# EAGLE board PCB-E21-CMB6 (EAGLE 7.7.0), part 1 of 2
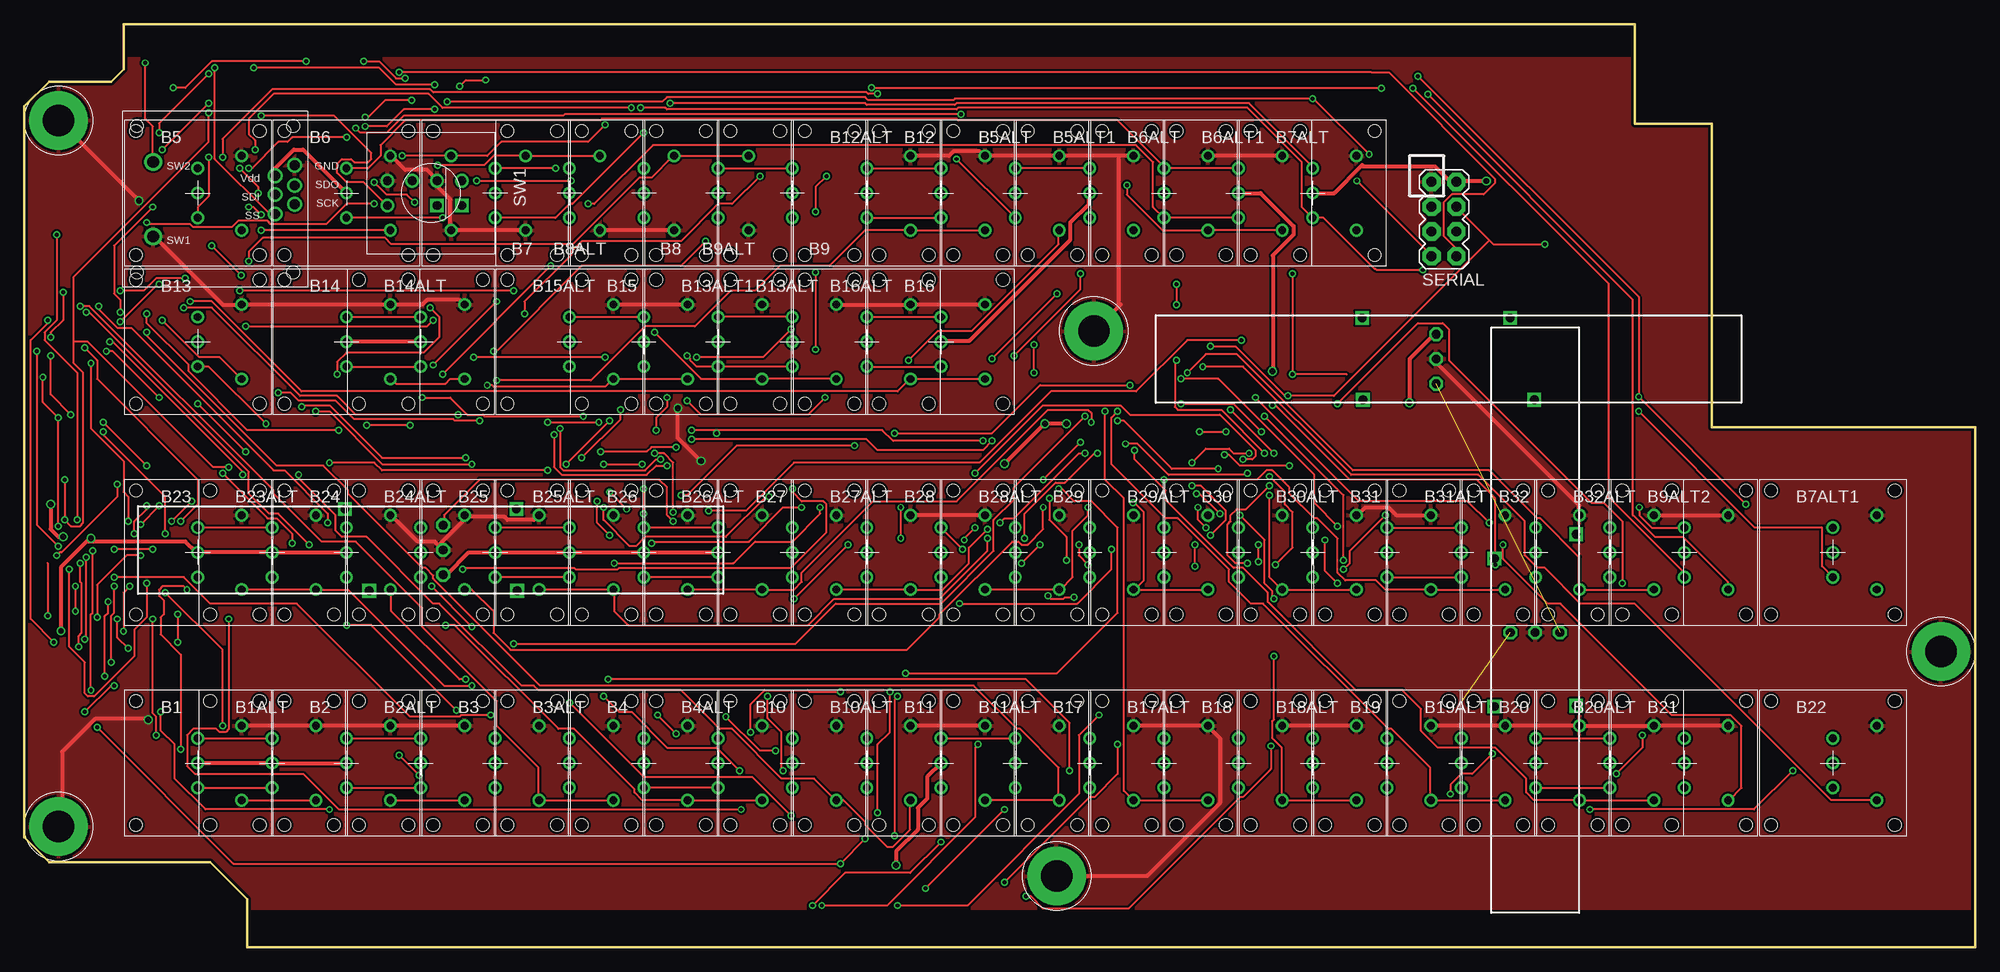
[diagram p0: board, top side]
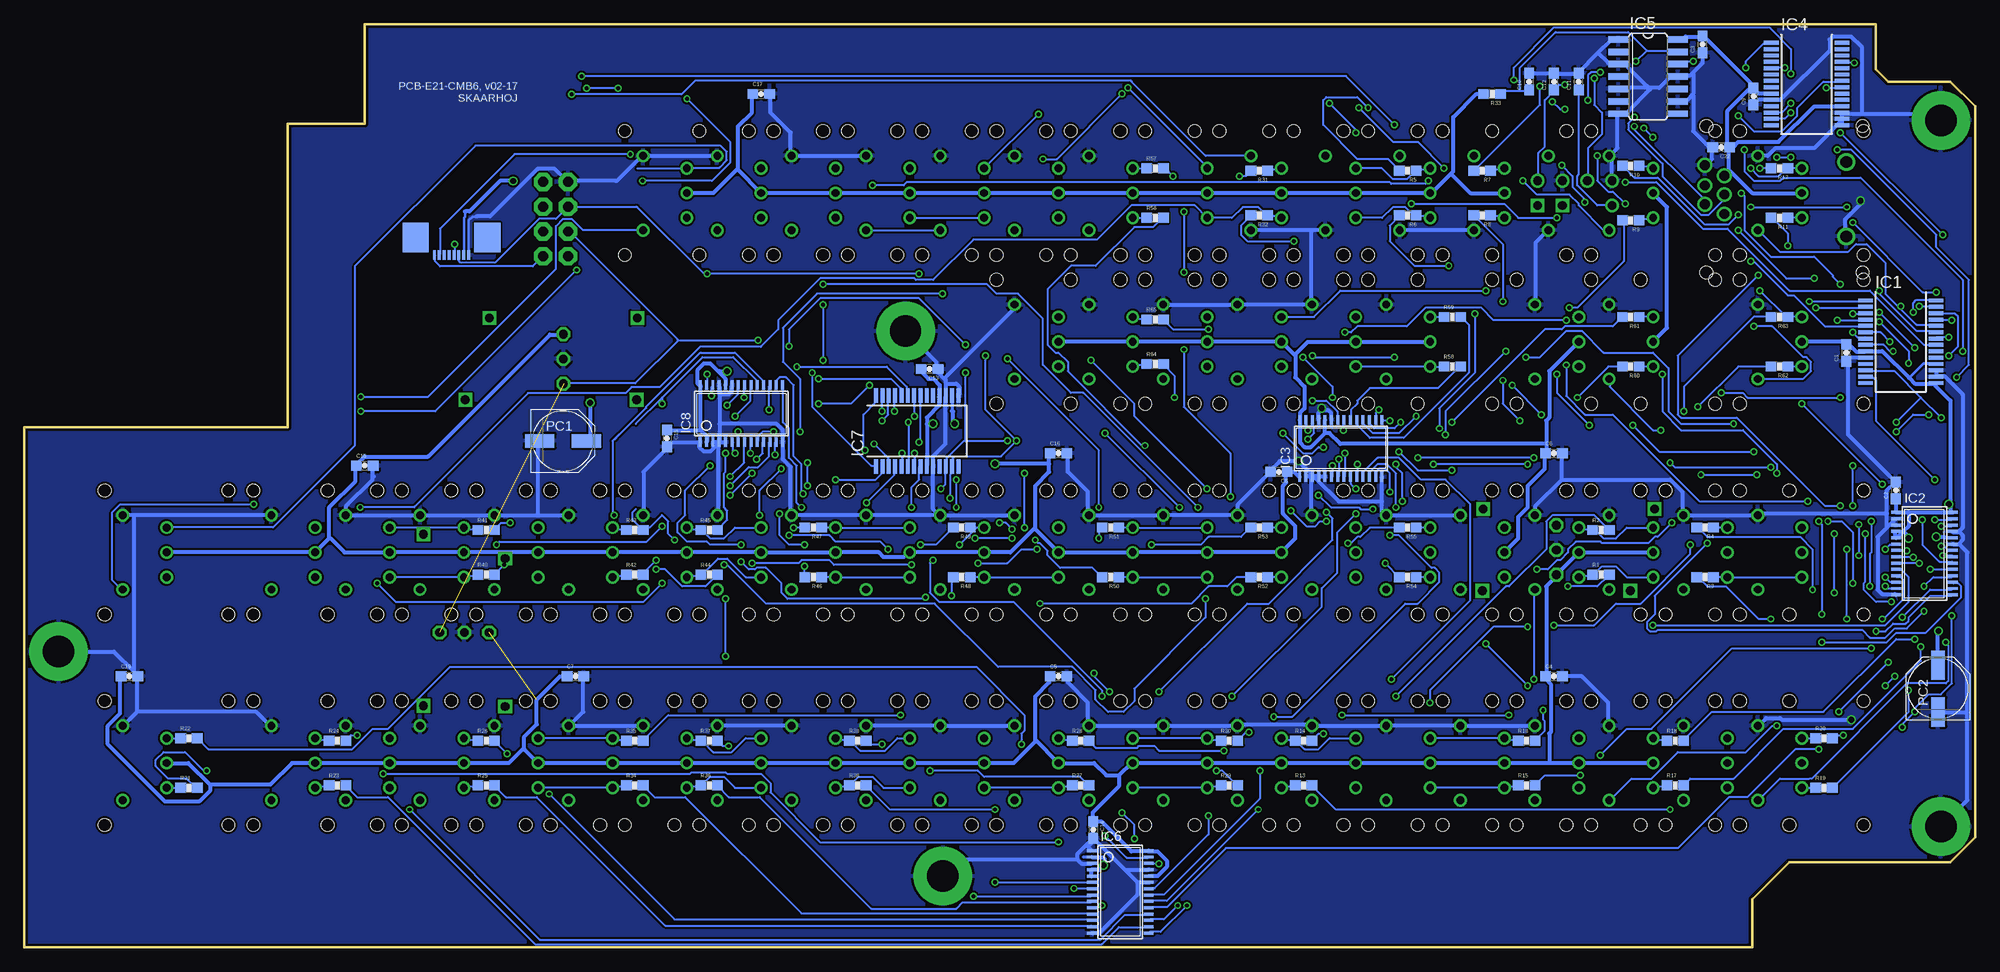
[diagram p1: board, bottom side, seen from below]

Size 200 x 94.6 mm. Coordinates in mm from the lower left corner, seen from the top.
Outline: 0,86.2 0,11.27 2.54,8.73 19.05,8.73 22.86,4.92 22.86,0 200,0 200,53.3 173.03,53.3 173.03,84.42 165.1,84.42 165.1,94.6 10.16,94.6 10.16,90.01 8.89,88.74 2.54,88.74 0,86.2
Copper layers (1*16): Top 0.035mm / dielectric 1.5mm / Bottom 0.035mm
Design rules "Fusion_eagle_rule_v1.1": minimum track width 6mil, minimum drill 12mil, track to track 6mil, track to pad 6mil, pad to pad 6mil, via to via 6mil, smd to smd 0mil, copper to edge 10mil, drill to drill 10mil, minimum pad ring 10mil, minimum via ring 6mil, stop-mask expansion 2mil, vias tented up to drill 100mil, thermal gap 10mil
Net classes: 0 default: width 0.203 mm, drill 0.406 mm, clearance 0.152 mm; 1 Power: width 0.406 mm, drill 0.61 mm, clearance 0.203 mm
tRestrict: area 0,-2.7 to 223,3.8; area 0,91.3 to 223,97.3
bRestrict: area 0,94.8 to 223,97.3; area 0,-2.7 to 223,-0.2

## Footprints (pad centres in the part's own frame; a part is rotated, then mirrored left to right if it is on the bottom)
LP11 = drill 0.8: COM 0,0; P$2 0,2.54; P$3 0,-2.54; P$4 4.5,3.81; P$5 4.5,-3.81 | hole 1.3: -6.35,6.35; 6.35,6.35; 6.35,-6.35; -6.35,-6.35
0603-CAP = smd 1.1 x 1: 1 -0.85,0; 2 0.85,0
SSOP28 = smd 0.4 x 1.5: 1 -4.225,-3.625; 2 -3.575,-3.625; 3 -2.925,-3.625; 4 -2.275,-3.625; 5 -1.625,-3.625; 6 -0.975,-3.625; 7 -0.325,-3.625; 8 0.325,-3.625; 9 0.975,-3.625; 10 1.625,-3.625; 11 2.275,-3.625; 12 2.925,-3.625; 13 3.575,-3.625; 14 4.225,-3.625; 15 4.225,3.625; 16 3.575,3.625; 17 2.925,3.625; 18 2.275,3.625; 19 1.625,3.625; 20 0.975,3.625; 21 0.325,3.625; 22 -0.325,3.625; 23 -0.975,3.625; 24 -1.625,3.625; 25 -2.275,3.625; 26 -2.925,3.625; 27 -3.575,3.625; 28 -4.225,3.625
TSSOP28 = smd 0.305 x 0.991: 1 -4.225,-2.918; 2 -3.575,-2.918; 3 -2.925,-2.918; 4 -2.275,-2.918; 5 -1.625,-2.918; 6 -0.975,-2.918; 7 -0.325,-2.918; 8 0.325,-2.918; 9 0.975,-2.918; 10 1.625,-2.918; 11 2.275,-2.918; 12 2.925,-2.918; 13 3.575,-2.918; 14 4.225,-2.918; 15 4.225,2.918; 16 3.575,2.918; 17 2.925,2.918; 18 2.275,2.918; 19 1.625,2.918; 20 0.975,2.918; 21 0.325,2.918; 22 -0.325,2.918; 23 -0.975,2.918; 24 -1.625,2.918; 25 -2.275,2.918; 26 -2.925,2.918; 27 -3.575,2.918; 28 -4.225,2.918
SO14 = smd 0.66 x 2.032: 1 -3.81,-3.073; 2 -2.54,-3.073; 3 -1.27,-3.073; 4 0,-3.073; 5 1.27,-3.073; 6 2.54,-3.073; 7 3.81,-3.073; 8 3.81,3.073; 9 2.54,3.073; 10 1.27,3.073; 11 0,3.073; 12 -1.27,3.073; 13 -2.54,3.073; 14 -3.81,3.073
PANASONIC_D = smd 3 x 1.4: + 2.4,0; - -2.4,0
SLIDER45-CAR1 = drill 0.9 octagon: 1 -1.27,2.54; 2A -1.27,-2.54; 3 -1.27,0 | drill 0.9 square: P$1 -8.852,4.191; P$2 6.312,4.191; P$3 8.788,-4.191; P$4 -8.788,-4.191
0603-RES = smd 1.1 x 1: 1 -0.85,0; 2 0.85,0
2X4 = drill 1.016 pad 1.88 octagon: 1 -3.81,-1.27; 2 -3.81,1.27; 3 -1.27,-1.27; 4 -1.27,1.27; 5 1.27,-1.27; 6 1.27,1.27; 7 3.81,-1.27; 8 3.81,1.27
SMART_SWITCH = drill 1.2: 1 6.35,3.81; 2 6.35,-3.81 | drill 1: 3 -8.153,-3.48; 4 -6.147,-2.413; 5 -8.153,-1.422; 6 -6.147,-0.483; 7 -8.153,0.508; 8 -6.147,1.499 | hole 1.3: -8.001,7.506; 8.001,7.506; 8.001,-7.506; -8.001,-7.506
ALPS_EC12E_SW-CAR1 = drill 0.9: A 1.27,-4.445; B -1.27,-1.905; C -1.27,-4.445; D -1.27,0.635; E -1.27,3.175 | drill 0.9 square: GND1 1.27,3.175; GND2 1.27,0.635
3.2MMPAD6MM = drill 3.2 pad 6: P$1 0,0
ZIP-8-0.5 = smd 2.7 x 3: GND$1 3.68,-1.8; GND$9 -3.68,-1.8 | smd 0.3 x 0.96: P$1 -1.75,0; P$2 -1.25,0; P$3 -0.75,0; P$4 -0.25,0; P$5 0.25,0; P$6 0.75,0; P$7 1.25,0; P$8 1.75,0

## Placement (x,y rotation side)
B1  LP11-B"  [LP11]  17.78,18.89 0 top
B1ALT  LP11-B"  [LP11]  25.4,18.89 0 top
B2  LP11-B"  [LP11]  33.02,18.89 0 top
B2ALT  LP11-B"  [LP11]  40.64,18.89 0 top
B3  LP11-B"  [LP11]  48.26,18.89 0 top
B3ALT  LP11-B"  [LP11]  55.88,18.89 0 top
B4  LP11-B"  [LP11]  63.5,18.89 0 top
B4ALT  LP11-B"  [LP11]  71.12,18.89 0 top
B5  LP11-B"  [LP11]  17.78,77.31 0 top
B5ALT  LP11-B"  [LP11]  101.6,77.31 0 top
B5ALT1  LP11-B"  [LP11]  109.22,77.31 0 top
B6  LP11-B"  [LP11]  33.02,77.31 0 top
B6ALT  LP11-B"  [LP11]  116.84,77.31 0 top
B6ALT1  LP11-B"  [LP11]  124.46,77.31 0 top
B7  LP11-B"  [LP11]  48.26,77.31 180 top
B7ALT  LP11-B"  [LP11]  132.08,77.31 0 top
B7ALT1  LP11-B"  [LP11]  185.42,40.48 0 top
B8  LP11-B"  [LP11]  63.5,77.31 180 top
B8ALT  LP11-B"  [LP11]  55.88,77.31 180 top
B9  LP11-B"  [LP11]  78.74,77.31 180 top
B9ALT  LP11-B"  [LP11]  71.12,77.31 180 top
B9ALT2  LP11-B"  [LP11]  170.18,40.48 0 top
B10  LP11-B"  [LP11]  78.74,18.89 0 top
B10ALT  LP11-B"  [LP11]  86.36,18.89 0 top
B11  LP11-B"  [LP11]  93.98,18.89 0 top
B11ALT  LP11-B"  [LP11]  101.6,18.89 0 top
B12  LP11-B"  [LP11]  93.98,77.31 0 top
B12ALT  LP11-B"  [LP11]  86.36,77.31 0 top
B13  LP11-B"  [LP11]  17.78,62.07 0 top
B13ALT  LP11-B"  [LP11]  78.74,62.07 0 top
B13ALT1  LP11-B"  [LP11]  71.12,62.07 0 top
B14  LP11-B"  [LP11]  33.02,62.07 0 top
B14ALT  LP11-B"  [LP11]  40.64,62.07 0 top
B15  LP11-B"  [LP11]  63.5,62.07 0 top
B15ALT  LP11-B"  [LP11]  55.88,62.07 0 top
B16  LP11-B"  [LP11]  93.98,62.07 0 top
B16ALT  LP11-B"  [LP11]  86.36,62.07 0 top
B17  LP11-B"  [LP11]  109.22,18.89 0 top
B17ALT  LP11-B"  [LP11]  116.84,18.89 0 top
B18  LP11-B"  [LP11]  124.46,18.89 0 top
B18ALT  LP11-B"  [LP11]  132.08,18.89 0 top
B19  LP11-B"  [LP11]  139.7,18.89 0 top
B19ALT  LP11-B"  [LP11]  147.32,18.89 0 top
B20  LP11-B"  [LP11]  154.94,18.89 0 top
B20ALT  LP11-B"  [LP11]  162.56,18.89 0 top
B21  LP11-B"  [LP11]  170.18,18.89 0 top
B22  LP11-B"  [LP11]  185.42,18.89 0 top
B23  LP11-B"  [LP11]  17.78,40.48 0 top
B23ALT  LP11-B"  [LP11]  25.4,40.48 0 top
B24  LP11-B"  [LP11]  33.02,40.48 0 top
B24ALT  LP11-B"  [LP11]  40.64,40.48 0 top
B25  LP11-B"  [LP11]  48.26,40.48 0 top
B25ALT  LP11-B"  [LP11]  55.88,40.48 0 top
B26  LP11-B"  [LP11]  63.5,40.48 0 top
B26ALT  LP11-B"  [LP11]  71.12,40.48 0 top
B27  LP11-B"  [LP11]  78.74,40.48 0 top
B27ALT  LP11-B"  [LP11]  86.36,40.48 0 top
B28  LP11-B"  [LP11]  93.98,40.48 0 top
B28ALT  LP11-B"  [LP11]  101.6,40.48 0 top
B29  LP11-B"  [LP11]  109.22,40.48 0 top
B29ALT  LP11-B"  [LP11]  116.84,40.48 0 top
B30  LP11-B"  [LP11]  124.46,40.48 0 top
B30ALT  LP11-B"  [LP11]  132.08,40.48 0 top
B31  LP11-B"  [LP11]  139.7,40.48 0 top
B31ALT  LP11-B"  [LP11]  147.32,40.48 0 top
B32  LP11-B"  [LP11]  154.94,40.48 0 top
B32ALT  LP11-B"  [LP11]  162.56,40.48 0 top
C1  100nF  [0603-CAP]  13.21,60.93 90 bottom
C2  100nF  [0603-CAP]  8.13,46.83 90 bottom
C3  100nF  [0603-CAP]  27.94,92.55 90 bottom
C4  100nF  [0603-CAP]  43.18,27.78 0 bottom
C5  100nF  [0603-CAP]  93.98,27.78 0 bottom
C6  100nF  [0603-CAP]  43.18,50.64 0 bottom
C7  100nF  [0603-CAP]  143.51,27.78 0 bottom
C8  100nF  [0603-CAP]  71.37,48.73 180 bottom
C9  100nF  [0603-CAP]  22.73,87.22 90 bottom
C10  10nF  [0603-CAP]  45.72,88.74 90 bottom
C11  10nF  [0603-CAP]  40.64,88.74 90 bottom
C12  10nF  [0603-CAP]  43.18,88.74 90 bottom
C13  100nF  [0603-CAP]  107.19,59.28 180 bottom
C14  100nF  [0603-CAP]  90.42,12.03 270 bottom
C15  100nF  [0603-CAP]  134.11,52.16 270 bottom
C16  100nF  [0603-CAP]  93.98,50.64 0 bottom
C17  100nF  [0603-CAP]  124.46,87.47 0 bottom
C18  100nF  [0603-CAP]  165.1,49.37 0 bottom
C19  100nF  [0603-CAP]  189.23,27.78 0 bottom
C22  100nF  [0603-CAP]  26.04,82.01 180 bottom
IC1  MCP23017SS  [SSOP28]  7.62,62.07 270 bottom
IC2  PCA9685  [TSSOP28]  5.21,40.35 270 bottom
IC3  PCA9685  [TSSOP28]  65.02,51.15 0 bottom
IC4  MCP23017SS  [SSOP28]  17.27,88.49 270 bottom
IC5  74HCT14D  [SO14]  33.53,89.25 270 bottom
IC6  PCA9685  [TSSOP28]  87.63,5.68 270 bottom
IC7  MCP23017SS  [SSOP28]  108.46,52.93 0 bottom
IC8  PCA9685  [TSSOP28]  126.49,54.7 0 bottom
PC1  47u  [PANASONIC_D]  144.78,51.91 0 bottom
PC2  47u  [PANASONIC_D]  3.81,26.51 90 bottom
POT1  SLIDERC45  [SLIDER45-CAR1]  41.66,40.73 180 top
POT1ALT  SLIDERC45  [SLIDER45-CAR1]  146.01,60.31 0 top
POT2  SLIDERC45  [SLIDER45-CAR1]  154.89,33.54 90 top
R1  270  [0603-RES]  38.35,38.19 0 bottom
R2  270  [0603-RES]  38.35,42.77 0 bottom
R3  270  [0603-RES]  27.69,37.94 180 bottom
R4  270  [0603-RES]  27.69,43.02 180 bottom
R5  270  [0603-RES]  58.17,79.6 180 bottom
R6  270  [0603-RES]  58.17,75.02 180 bottom
R7  270  [0603-RES]  50.55,79.6 180 bottom
R8  270  [0603-RES]  50.55,75.02 180 bottom
R9  270  [0603-RES]  35.31,74.52 180 bottom
R10  270  [0603-RES]  35.31,80.1 180 bottom
R11  270  [0603-RES]  20.07,74.77 180 bottom
R12  270  [0603-RES]  20.07,79.85 180 bottom
R13  270  [0603-RES]  68.83,16.6 0 bottom
R14  270  [0603-RES]  68.83,21.18 0 bottom
R15  270  [0603-RES]  45.97,16.6 0 bottom
R16  270  [0603-RES]  45.97,21.18 0 bottom
R17  270  [0603-RES]  30.73,16.6 0 bottom
R18  270  [0603-RES]  30.73,21.18 0 bottom
R19  270  [0603-RES]  15.49,16.35 0 bottom
R20  270  [0603-RES]  15.49,21.43 0 bottom
R21  270  [0603-RES]  183.13,16.35 0 bottom
R22  270  [0603-RES]  183.13,21.43 0 bottom
R23  270  [0603-RES]  167.89,16.6 0 bottom
R24  270  [0603-RES]  167.89,21.18 0 bottom
R25  270  [0603-RES]  152.65,16.6 0 bottom
R26  270  [0603-RES]  152.65,21.18 0 bottom
R27  270  [0603-RES]  91.69,16.6 0 bottom
R28  270  [0603-RES]  91.69,21.18 0 bottom
R29  270  [0603-RES]  76.45,16.6 0 bottom
R30  270  [0603-RES]  76.45,21.18 0 bottom
R31  270  [0603-RES]  73.41,79.6 180 bottom
R32  270  [0603-RES]  73.41,75.02 180 bottom
R33  100K  [0603-RES]  49.53,87.47 180 bottom
R34  270  [0603-RES]  137.41,16.6 0 bottom
R35  270  [0603-RES]  137.41,21.18 0 bottom
R36  270  [0603-RES]  129.79,16.6 0 bottom
R37  270  [0603-RES]  129.79,21.18 0 bottom
R38  270  [0603-RES]  114.55,16.6 0 bottom
R39  270  [0603-RES]  114.55,21.18 0 bottom
R40  270  [0603-RES]  152.65,38.19 0 bottom
R41  270  [0603-RES]  152.65,42.77 0 bottom
R42  270  [0603-RES]  137.41,38.19 0 bottom
R43  270  [0603-RES]  137.41,42.77 0 bottom
R44  270  [0603-RES]  129.79,38.19 0 bottom
R45  270  [0603-RES]  129.79,42.77 0 bottom
R46  270  [0603-RES]  119.13,37.94 180 bottom
R47  270  [0603-RES]  119.13,43.02 180 bottom
R48  270  [0603-RES]  103.89,37.94 180 bottom
R49  270  [0603-RES]  103.89,43.02 180 bottom
R50  270  [0603-RES]  88.65,37.94 180 bottom
R51  270  [0603-RES]  88.65,43.02 180 bottom
R52  270  [0603-RES]  73.41,37.94 180 bottom
R53  270  [0603-RES]  73.41,43.02 180 bottom
R54  270  [0603-RES]  58.17,37.94 180 bottom
R55  270  [0603-RES]  58.17,43.02 180 bottom
R56  270  [0603-RES]  84.07,74.77 0 bottom
R57  270  [0603-RES]  84.07,79.85 0 bottom
R58  270  [0603-RES]  53.59,59.53 0 bottom
R59  270  [0603-RES]  53.59,64.61 0 bottom
R60  270  [0603-RES]  35.31,59.53 180 bottom
R61  270  [0603-RES]  35.31,64.61 180 bottom
R62  270  [0603-RES]  20.07,59.53 180 bottom
R63  270  [0603-RES]  20.07,64.61 180 bottom
R64  270  [0603-RES]  84.07,59.78 0 bottom
R65  270  [0603-RES]  84.07,64.36 0 bottom
SERIAL  M04X2  [2X4]  145.54,74.64 270 top
SSW1  SMART_SWITCHSMART_SWITCH_8PIN  [SMART_SWITCH]  19.56,76.67 180 top
SW1  EC12E_SWCAR1  [ALPS_EC12E_SW-CAR1]  41.67,77.31 270 top
U$25  GNDPAD6MM  [3.2MMPAD6MM]  3.5,84.76 0 top
U$26  GNDPAD6MM  [3.2MMPAD6MM]  105.84,7.3 0 top
U$27  GNDPAD6MM  [3.2MMPAD6MM]  109.65,63.17 0 top
U$28  GNDPAD6MM  [3.2MMPAD6MM]  3.5,12.38 0 top
U$51  GNDPAD6MM  [3.2MMPAD6MM]  196.5,30.32 0 top
U$94  M04X2ZIF-0.5  [ZIP-8-0.5]  156.21,70.96 180 bottom

## Library data of the parts
B1 B1ALT B2 B2ALT B3 B3ALT B4 B4ALT B5 B5ALT B5ALT1 B6 B6ALT B6ALT1 B7 B7ALT B7ALT1 B8 B8ALT B9 B9ALT B9ALT2 B10 B10ALT B11 B11ALT B12 B12ALT B13 B13ALT B13ALT1 B14 B14ALT B15 B15ALT B16 B16ALT B17 B17ALT B18 B18ALT B19 B19ALT B20 B20ALT B21-B23 B23ALT B24 B24ALT B25 B25ALT B26 B26ALT B27 B27ALT B28 B28ALT B29 B29ALT B30 B30ALT B31 B31ALT B32 B32ALT POT1 POT1ALT POT2 SSW1 SW1 U$25-U$28 U$51 = SKAARHOJ
C1-C9 C13-C19 C22 = SparkFun; SKAARHOJ_ID: SK_100nF
C10-C12 = SparkFun; SKAARHOJ_ID: SK_10nF
IC1 IC4 IC7 = microchip; MF: MICROCHIP; MPN: MCP23017-E/SS; OC_FARNELL: 1467674; OC_NEWARK: 31K2960; SKAARHOJ_ID: SK_MCP23017
IC2 IC3 IC6 IC8 = wsmith; SKAARHOJ_ID: SK_PCA9685
IC5 = 74xx-eu; SKAARHOJ_ID: SK_74HCT14
PC1 PC2 = rcl; SKAARHOJ_ID: SK_47uF
R1-R32 R34-R65 = SparkFun; SKAARHOJ_ID: SK_270R
R33 = SparkFun; SKAARHOJ_ID: SK_100K
SERIAL = SparkFun; SKAARHOJ_ID: SK_2x4header
U$94 = SKAARHOJ; SKAARHOJ_ID: SK_ M04X2ZIF-0.5

## Nets
5V [Power]: B1.COM B1ALT.COM B2.COM B2ALT.COM B3.COM B3ALT.COM B4.COM B4ALT.COM B5.COM B5ALT1.COM B5ALT.COM B6.COM B6ALT1.COM B6ALT.COM B7.COM B7ALT1.COM B7ALT.COM B8.COM B8ALT.COM B9.COM B9ALT2.COM B9ALT.COM B10.COM B10ALT.COM B11.COM B11ALT.COM B12.COM B12ALT.COM B13.COM B13ALT1.COM B13ALT.COM B14.COM B14ALT.COM B15.COM B15ALT.COM B16.COM B16ALT.COM B17.COM B17ALT.COM B18.COM B18ALT.COM B19.COM B19ALT.COM B20.COM B20ALT.COM B21.COM B22.COM B23.COM B23ALT.COM B24.COM B24ALT.COM B25.COM B25ALT.COM B26.COM B26ALT.COM B27.COM B27ALT.COM B28.COM B28ALT.COM B29.COM B29ALT.COM B30.COM B30ALT.COM B31.COM B31ALT.COM B32.COM B32ALT.COM C1.2 C2.1 C3.2 C4.1 C5.1 C6.1 C7.1 C8.1 C9.2 C13.2 C14.1 C15.1 C16.1 C17.1 C18.1 C19.1 C22.1 IC1.9 IC1.15 IC1.18 IC2.1 IC2.4 IC2.5 IC2.24 IC2.28 IC3.1 IC3.24 IC3.28 IC4.9 IC4.18 IC5.14 IC6.2 IC6.4 IC6.5 IC6.24 IC6.28 IC7.9 IC7.16 IC7.18 IC8.2 IC8.24 IC8.28 PC1.+ PC2.+ POT1.1 POT1ALT.1 POT2.1 R33.2 SERIAL.2 SSW1.4 U$94.P$2
A0: POT1.2A POT1ALT.2A POT2.2A SERIAL.5
AD0: C12.1 IC4.1 SW1.E
D2: IC4.21 IC5.12
D3: C11.1 IC4.22 SW1.A
GND [Power]: B1.P$4 B1ALT.P$4 B2.P$4 B2ALT.P$4 B3.P$4 B3ALT.P$4 B4.P$4 B4ALT.P$4 B5.P$4 B5ALT1.P$4 B5ALT.P$4 B6.P$4 B6ALT1.P$4 B6ALT.P$4 B7.P$4 B7ALT1.P$4 B7ALT.P$4 B8.P$4 B8ALT.P$4 B9.P$4 B9ALT2.P$4 B9ALT.P$4 B10.P$4 B10ALT.P$4 B11.P$4 B11ALT.P$4 B12.P$4 B12ALT.P$4 B13.P$4 B13ALT1.P$4 B13ALT.P$4 B14.P$4 B14ALT.P$4 B15.P$4 B15ALT.P$4 B16.P$4 B16ALT.P$4 B17.P$4 B17ALT.P$4 B18.P$4 B18ALT.P$4 B19.P$4 B19ALT.P$4 B20.P$4 B20ALT.P$4 B21.P$4 B22.P$4 B23.P$4 B23ALT.P$4 B24.P$4 B24ALT.P$4 B25.P$4 B25ALT.P$4 B26.P$4 B26ALT.P$4 B27.P$4 B27ALT.P$4 B28.P$4 B28ALT.P$4 B29.P$4 B29ALT.P$4 B30.P$4 B30ALT.P$4 B31.P$4 B31ALT.P$4 B32.P$4 B32ALT.P$4 C1.1 C2.2 C3.1 C4.2 C5.2 C6.2 C7.2 C8.2 C9.1 C10.2 C11.2 C12.2 C13.1 C14.2 C15.2 C16.2 C17.2 C18.2 C19.2 C22.2 IC1.10 IC1.16 IC1.17 IC2.2 IC2.3 IC2.14 IC2.23 IC2.25 IC3.2 IC3.3 IC3.4 IC3.5 IC3.14 IC3.23 IC3.25 IC4.10 IC4.15 IC4.16 IC4.17 IC5.1 IC5.3 IC5.5 IC5.7 IC5.9 IC5.11 IC6.1 IC6.3 IC6.14 IC6.23 IC6.25 IC7.10 IC7.15 IC7.17 IC8.1 IC8.3 IC8.4 IC8.5 IC8.14 IC8.23 IC8.25 PC1.- PC2.- POT1.3 POT1ALT.3 POT2.3 SERIAL.1 SSW1.1 SSW1.3 SW1.C SW1.D U$25.P$1 U$26.P$1 U$27.P$1 U$28.P$1 U$51.P$1 U$94.P$1
GPA0: B8.P$5 B8ALT.P$5 IC1.21
GPA1: B7.P$5 B7ALT1.P$5 B7ALT.P$5 IC1.22
GPA2: B6.P$5 B6ALT1.P$5 B6ALT.P$5 IC1.23
GPA3: B5.P$5 B5ALT1.P$5 B5ALT.P$5 IC1.24
GPA4: B1.P$5 B1ALT.P$5 IC1.25
GPA4S: IC4.25 SSW1.2
GPA5: B2.P$5 B2ALT.P$5 IC1.26
GPA6: B3.P$5 B3ALT.P$5 IC1.27
GPA7: B4.P$5 B4ALT.P$5 IC1.28
GPA8: B16.P$5 B16ALT.P$5 IC1.1
GPA9: B15.P$5 B15ALT.P$5 IC1.2
GPA10: B14.P$5 B14ALT.P$5 IC1.3
GPA11: B13.P$5 B13ALT1.P$5 B13ALT.P$5 IC1.4
GPA12: B9.P$5 B9ALT2.P$5 B9ALT.P$5 IC1.5
GPA13: B10.P$5 B10ALT.P$5 IC1.6
GPA14: B11.P$5 B11ALT.P$5 IC1.7
GPA15: B12.P$5 B12ALT.P$5 IC1.8
GPA16: B24.P$5 B24ALT.P$5 IC7.21
GPA17: B23.P$5 B23ALT.P$5 IC7.22
GPA18: B22.P$5 IC7.23
GPA19: B21.P$5 IC7.24
GPA20: B17.P$5 B17ALT.P$5 IC7.25
GPA21: B18.P$5 B18ALT.P$5 IC7.26
GPA22: B19.P$5 B19ALT.P$5 IC7.27
GPA23: B20.P$5 B20ALT.P$5 IC7.28
GPA24: B32.P$5 B32ALT.P$5 IC7.1
GPA25: B31.P$5 B31ALT.P$5 IC7.2
GPA26: B30.P$5 B30ALT.P$5 IC7.3
GPA27: B29.P$5 B29ALT.P$5 IC7.4
GPA28: B25.P$5 B25ALT.P$5 IC7.5
GPA29: B26.P$5 B26ALT.P$5 IC7.6
GPA30: B27.P$5 B27ALT.P$5 IC7.7
GPA31: B28.P$5 B28ALT.P$5 IC7.8
GPB4: IC4.5 SSW1.8
I2C_SCL: IC1.12 IC2.26 IC3.26 IC4.12 IC6.26 IC7.12 IC8.26 SERIAL.4 U$94.P$4
I2C_SDA: IC1.13 IC2.27 IC3.27 IC4.13 IC6.27 IC7.13 IC8.27 SERIAL.3 U$94.P$3
L0: B1.P$2 B1ALT.P$2 R20.1
L1: B1.P$3 B1ALT.P$3 R19.1
L2: B2.P$2 B2ALT.P$2 R18.1
L3: B2.P$3 B2ALT.P$3 R17.1
L4: B3.P$2 B3ALT.P$2 R16.1
L5: B3.P$3 B3ALT.P$3 R15.1
L6: B4.P$2 B4ALT.P$2 R14.1
L7: B4.P$3 B4ALT.P$3 R13.1
L8: B5.P$2 B5ALT1.P$2 B5ALT.P$2 R12.1
L9: B5.P$3 B5ALT1.P$3 B5ALT.P$3 R11.1
L10: B6.P$2 B6ALT1.P$2 B6ALT.P$2 R10.1
L11: B6.P$3 B6ALT1.P$3 B6ALT.P$3 R9.1
L12: B7.P$2 B7ALT1.P$2 B7ALT.P$2 R8.1
L13: B7.P$3 B7ALT1.P$3 B7ALT.P$3 R7.1
L14: B8.P$2 B8ALT.P$2 R6.1
L15: B8.P$3 B8ALT.P$3 R5.1
L16: B9.P$2 B9ALT2.P$2 B9ALT.P$2 R32.1
L17: B9.P$3 B9ALT2.P$3 B9ALT.P$3 R31.1
L18: B10.P$2 B10ALT.P$2 R30.1
L19: B10.P$3 B10ALT.P$3 R29.1
L20: B11.P$2 B11ALT.P$2 R28.1
L21: B11.P$3 B11ALT.P$3 R27.1
L22: B12.P$2 B12ALT.P$2 R57.1
L23: B12.P$3 B12ALT.P$3 R56.1
L24: B13.P$2 B13ALT1.P$2 B13ALT.P$2 R63.1
L25: B13.P$3 B13ALT1.P$3 B13ALT.P$3 R62.1
L26: B14.P$2 B14ALT.P$2 R61.1
L27: B14.P$3 B14ALT.P$3 R60.1
L28: B15.P$2 B15ALT.P$2 R59.1
L29: B15.P$3 B15ALT.P$3 R58.1
L30: B16.P$2 B16ALT.P$2 R65.1
L31: B16.P$3 B16ALT.P$3 R64.1
L32: B17.P$2 B17ALT.P$2 R39.1
L33: B17.P$3 B17ALT.P$3 R38.1
L34: B18.P$2 B18ALT.P$2 R37.1
L35: B18.P$3 B18ALT.P$3 R36.1
L36: B19.P$2 B19ALT.P$2 R35.1
L37: B19.P$3 B19ALT.P$3 R34.1
L38: B20.P$2 B20ALT.P$2 R26.1
L39: B20.P$3 B20ALT.P$3 R25.1
L40: B21.P$2 R24.1
L41: B21.P$3 R23.1
L42: B22.P$2 R22.1
L43: B22.P$3 R21.1
L44: B23.P$2 B23ALT.P$2 R4.1
L45: B23.P$3 B23ALT.P$3 R3.1
L46: B24.P$2 B24ALT.P$2 R2.1
L47: B24.P$3 B24ALT.P$3 R1.1
L48: B25.P$2 B25ALT.P$2 R55.1
L49: B25.P$3 B25ALT.P$3 R54.1
L50: B26.P$2 B26ALT.P$2 R53.1
L51: B26.P$3 B26ALT.P$3 R52.1
L52: B27.P$2 B27ALT.P$2 R51.1
L53: B27.P$3 B27ALT.P$3 R50.1
L54: B28.P$2 B28ALT.P$2 R49.1
L55: B28.P$3 B28ALT.P$3 R48.1
L56: B29.P$2 B29ALT.P$2 R47.1
L57: B29.P$3 B29ALT.P$3 R46.1
L58: B30.P$2 B30ALT.P$2 R45.1
L59: B30.P$3 B30ALT.P$3 R44.1
L60: B31.P$2 B31ALT.P$2 R43.1
L61: B31.P$3 B31ALT.P$3 R42.1
L62: B32.P$2 B32ALT.P$2 R41.1
L63: B32.P$3 B32ALT.P$3 R40.1
MOSI: SERIAL.8 SSW1.6 U$94.P$8
N$2: IC6.13 R25.2
N$3: IC3.11 R27.2
N$4: IC2.13 R13.2
N$5: IC2.12 R14.2
N$6: IC3.10 R28.2
N$7: IC2.11 R15.2
N$8: IC3.9 R29.2
N$9: IC2.10 R16.2
N$10: IC2.9 R17.2
N$11: IC2.8 R18.2
N$12: IC2.7 R19.2
N$13: IC3.8 R30.2
N$14: IC3.7 R31.2
N$15: IC3.6 R32.2
N$16: IC6.12 R26.2
N$17: IC6.11 R34.2
N$18: IC6.10 R35.2
N$19: IC2.6 R20.2
N$20: IC2.15 R12.2
N$21: IC2.16 R11.2
N$22: IC2.17 R10.2
N$23: IC2.18 R9.2
N$24: IC2.19 R8.2
N$25: IC2.20 R7.2
N$26: IC2.21 R6.2
N$27: IC2.22 R5.2
N$28: IC6.9 R36.2
N$29: IC6.8 R37.2
N$30: IC6.7 R38.2
N$31: IC6.6 R39.2
N$32: IC6.15 R24.2
N$33: C10.1 IC5.13 R33.1 SW1.B
N$34: IC6.16 R23.2
N$35: IC6.17 R22.2
N$36: IC6.18 R21.2
N$37: IC6.19 R4.2
N$38: IC6.20 R3.2
N$39: IC6.21 R2.2
N$40: IC6.22 R1.2
N$41: IC8.13 R48.2
N$42: IC8.12 R49.2
N$43: IC8.11 R50.2
N$44: IC8.10 R51.2
N$45: IC8.9 R52.2
N$46: IC8.8 R53.2
N$47: IC8.7 R54.2
N$48: IC8.6 R55.2
N$49: IC8.15 R47.2
N$50: IC8.16 R46.2
N$51: IC8.17 R45.2
N$52: IC8.18 R44.2
N$53: IC8.19 R43.2
N$54: IC8.20 R42.2
N$55: IC8.21 R41.2
N$56: IC8.22 R40.2
N$57: IC3.12 R57.2
N$58: IC3.13 R56.2
N$59: IC3.15 R63.2
N$60: IC3.16 R62.2
N$61: IC3.17 R61.2
N$62: IC3.18 R60.2
N$63: IC3.19 R59.2
N$64: IC3.20 R58.2
N$65: IC3.21 R65.2
N$66: IC3.22 R64.2
SCLK: SERIAL.7 SSW1.7 U$94.P$7

## Tracks (layer width: path | path; a pad name or v marks a point on that pad's centre or on a via)
5V  (via drill 0.61)  (1 unrouted)
  Top 0.406: B1.COM B1ALT.COM B2.COM | v89.38,8.41 89.38,9.84 91.6,12.06 91.6,14.29 92.55,15.24 92.55,17.46 B11.COM | 137.15,80.15 134.3,77.31 B7ALT.COM | 137.15,80.15 137.16,80.17 | B24.COM B23ALT.COM B23.COM 17.62,40.48 16.51,41.59 6.83,41.59 | 6.83,41.59 6.35,41.59 3.81,39.05 3.75,38.92 v3.75,32.42 | v6.83,41.91 6.83,41.59 | B6.COM 28.57,81.75 27.62,81.75 25.72,79.85 25.72,79.22 SSW1.4 | B14ALT.COM B14.COM | POT1.1 43.02,38.26 43.34,38.26 45.56,40.48 B25.COM B25ALT.COM B26.COM B26ALT.COM | v106.84,53.66 v104.62,53.66 104.5,53.55 v100.5,49.55 | v3.97,42.07 3.49,42.07 2.7,42.86 v2.7,45.4 | v149.88,78.55 146.88,78.55 SERIAL.2 146.62,78.42 146.25,78.42 144.62,80.05 137.25,80.05 137.15,80.15 | v127.95,59.05 128,59.17 128,70.92 130.12,73.05 130.12,73.92 126.75,77.3 124.5,77.3 B6ALT1.COM | 162.5,40.55 B32ALT.COM | B5ALT1.COM 109.12,77.3 109.12,76.17 107.25,74.3 107.25,72.55 96.88,62.17 94,62.17 B16.COM | v142,55.8 142,60.3 144.5,62.8 POT1ALT.1
  Bottom 0.254: U$94.P$2 154.94,70.98 154.94,74.77 154.81,74.9 154.81,75.41
  Bottom 0.305: IC7.16 104.9,56.55 104.9,54.96 | IC6.2 91.44,9.26 91.44,9.24 | IC1.18 5.32,59.79 6.76,58.35 | IC2.24 3.02,41.98 3.05,42
  Bottom 0.406: IC4.9 22.18,87.51 C9.2 | C13.2 108.04,58.98 107.31,58.26 106.81,58.26 106.17,57.62 106.17,56.56 IC7.18 106.2,56.35 106.2,55.56 107.47,54.29 107.47,53.66 | IC6.24 84.61,7.3 83.82,7.3 82.87,8.25 82.87,8.89 83.82,9.84 84.61,9.84 IC6.28 84.77,9.84 86.52,9.84 89.53,12.86 90.33,12.86 C14.1 90.49,13.02 90.49,13.81 87.79,16.51 87.79,17.62 | B2.COM B2ALT.COM 43.66,18.89 | 43.66,18.89 B3.COM B3ALT.COM B4.COM B4ALT.COM B10.COM B10ALT.COM 86.52,18.89 87.79,17.62 | 180.97,16.67 180.97,16.03 182.09,14.92 185.58,14.92 191.45,20.8 191.45,22.7 190.18,23.97 190.18,27.78 C19.1 | 180.97,16.67 183.2,18.89 B22.COM | C7.1 145.1,27.78 147.48,25.4 147.48,22.86 148.75,21.59 148.75,20.32 | 148.75,20.32 B19ALT.COM B19.COM B18ALT.COM B18.COM B17ALT.COM B17.COM B11ALT.COM 98.58,18.89 96.36,21.11 96.36,21.27 | 148.75,20.32 148.91,20.32 150.34,18.89 B20.COM B20ALT.COM B21.COM 172.56,18.89 174.78,16.67 180.97,16.67 | IC6.5 90.65,7.3 90.65,7.94 IC6.4 90.49,7.94 89.85,7.94 v89.38,8.41 89.38,8.57 89.22,8.73 89.22,9.05 89.38,9.21 90.49,9.21 IC6.2 | 96.36,21.27 96.36,25.72 94.93,27.14 94.93,27.78 C5.1 | 96.36,21.27 B11.COM 90.33,18.89 89.06,17.62 87.79,17.62 | 126.84,79.69 126.84,84.14 125.41,85.56 125.41,87.47 C17.1 | 126.84,79.69 B6ALT1.COM B6ALT.COM B5ALT1.COM B5ALT.COM B12.COM B12ALT.COM B9.COM B9ALT.COM B8.COM B8ALT.COM 55.72,77.31 53.74,79.29 | B7ALT.COM 129.38,77.31 127,79.69 126.84,79.69 | R33.2 51.12,87.47 53.5,85.09 53.5,79.53 53.74,79.29 | B7.COM 51.75,77.31 53.74,79.29 | 107.47,53.66 107.47,49.37 IC7.9 | 128.83,58.97 129.7,59.85 130.33,59.85 130.97,59.21 130.97,57.78 130.81,57.62 IC8.28 130.65,57.47 130.65,53.02
  Bottom 0.406: 128.83,58.97 128.11,58.26 IC8.24 | 130.65,53.02 130.02,52.39 130.02,51.91 IC8.2 | 130.65,53.02 133.99,53.02 C15.1 | v127.95,59.05 128.75,59.05 128.83,58.97 | B15ALT.COM B15.COM 68.42,62.07 69.69,60.8 69.69,60.64 | 66.67,52.7 66.67,53.97 IC3.24 | 66.67,52.7 68.1,51.27 68.74,51.27 69.22,51.75 69.22,53.97 IC3.28 69.22,54.13 69.22,54.77 68.74,55.24 68.74,57.47 69.69,58.42 69.69,60.64 | 69.69,60.64 B13ALT1.COM B13ALT.COM B16ALT.COM B16.COM | 168.75,41.91 168.75,45.08 166.05,47.78 166.05,49.37 C18.1 165.88,49.55 165.12,50.3 158.62,50.3 146.12,62.8 144.75,62.8 POT1ALT.1 | 168.75,41.91 B9ALT2.COM B7ALT1.COM | 168.75,41.91 168.59,41.91 167.16,40.48 B32ALT.COM B32.COM B31ALT.COM B31.COM B30ALT.COM B30.COM B29ALT.COM 112.39,40.48 111.92,40 109.86,40 109.38,40.48 B29.COM B28ALT.COM 98.9,40.48 96.52,42.86 96.36,42.86 | IC2.4 8.26,42.54 8.26,42.07 IC2.5 7.94,42.07 7.38,42.62 | 8.1,44.61 6.83,44.61 | 6.83,44.61 2.54,44.61 | 2.54,44.61 2.38,44.61 IC2.28 | 8.1,44.61 IC2.1 | 8.1,44.61 8.1,45.88 C2.1 | 7.38,42.62 6.83,43.18 6.83,44.61 | 4.13,57.78 6.19,57.78 6.76,58.35 9.53,61.12 11.11,61.12 IC1.9 11.29,61.05 12.19,61.05 12.91,61.78 C1.2 13.02,61.91 13.18,62.07 B13.COM | 4.13,57.78 IC1.15 | 2.54,45.4 2.54,56.04 4.13,57.62 4.13,57.78 | 2.54,45.4 2.54,44.61 | 7.38,42.62 6.83,42.07 v6.83,41.91 | IC3.1 69.37,48.26 69.85,48.73 C8.1 70.64,48.58 70.64,47.62 70.96,47.31 70.96,44.45 69.69,43.18 69.69,41.91 B26ALT.COM B27.COM B27ALT.COM B28.COM 96.36,42.86 | 94.93,49.55 94.93,48.73 96.36,47.31 96.36,42.86 | 94.93,49.55 94.93,50.64 C16.1 | IC5.14 30.32,93.03 30,93.03 29.69,93.34 27.94,93.34 C3.2 27.78,93.34 22.7,88.26 C9.2
  Bottom 0.406: 25.24,79.53 25.24,81.91 C22.1 | 25.24,79.53 25.56,79.22 SSW1.4 | IC4.18 16.51,86.2 20.16,82.55 24.29,82.55 24.77,82.07 25.08,82.07 C22.1 | B5.COM 22.86,77.31 25.08,79.53 25.24,79.53 | C9.2 22.86,87.95 23.18,87.95 25.4,85.72 25.4,81.91 C22.1 | 43.97,51.59 43.97,53.97 43.66,54.29 43.66,59.05 B14ALT.COM | 43.97,51.59 43.97,50.64 C6.1 44.13,50.48 44.13,49.05 45.88,47.31 45.88,45.08 46.83,44.13 46.83,41.91 B25.COM | B6.COM 31.59,75.88 31.59,63.5 B14.COM | B24.COM B24ALT.COM POT1.1 42.86,38.1 43.97,36.99 43.97,27.78 C4.1 44.13,27.62 43.5,26.99 43.5,22.07 43.66,21.91 43.66,18.89 | 66.67,52.7 66.2,52.7 65.09,51.59 43.97,51.59 | v104.62,53.66 104.78,53.81 104.78,54.93 104.9,54.96 | 107.47,53.66 v106.84,53.66 | v3.97,42.07 3.17,42.07 3.05,42 | v2.7,45.4 2.54,45.4 | v149.88,78.55 151.25,78.55 154.38,75.42 154.75,75.42 154.81,75.41 | 94.93,49.55 v100.5,49.55 | v3.75,32.42 3.88,32.3 3.88,28.93 PC2.+ | v142,55.8 142,52.3 PC1.+
A0  (via drill 0.41)  (1 unrouted)
  Top 0.203: v66.52,43.65 65.88,44.29 65.88,47.15 65.09,47.94 46.67,47.94 43.02,44.29 43.02,43.34 POT1.2A | v70.17,44.77 73.98,44.77 78.9,49.69 97.95,49.69 105.25,56.99 113.98,56.99 119.22,62.23 v124.78,62.23
  Bottom 0.203: v66.52,43.65 67.15,43.65 67.63,43.18 68.58,43.18 v70.17,44.77 | 133.03,62.23 133,62.23 | 133,62.23 v124.78,62.23 | POT1ALT.2A 144.62,57.8 137.38,57.8 133,62.17 133,62.23 | SERIAL.5 144.25,73.3 144,73.3 133,62.3 133,62.23
AD0  (via drill 0.41)
  Top 0.203: v23.5,90.17 36.35,90.17 38.1,88.42 v42.07,88.42
  Bottom 0.203: SW1.E 44.77,78.58 44.77,81.44 44.13,82.07 44.13,86.83 43.18,87.79 C12.1 43.18,87.95 42.7,88.42 v42.07,88.42 | v23.5,90.17 23.5,90.8 21.59,92.71 20.95,92.71 IC4.1
D2  (via drill 0.41)
  Top 0.203: v15.24,88.11 16.51,88.11 19.21,90.8 v28.89,90.8
  Bottom 0.203: v15.24,88.11 13.65,88.11 IC4.21 | v28.89,90.8 30.16,90.8 30.32,90.64 IC5.12
D3  (via drill 0.41)
  Top 0.203: v24.29,85.25 31.75,85.25 35.56,81.44 35.56,80.8 35.24,80.48 33.81,80.48 33.5,80.8 32.54,80.8 32.07,80.33 32.07,79.37 33.02,78.42 34.77,78.42 37.15,76.04 SW1.A
  Bottom 0.203: C11.1 40.64,79.22 40.8,79.06 40.8,78.1 38.73,76.04 SW1.A | v24.29,85.25 22.7,83.66 19.84,83.66 18.26,85.25 18.26,86.04 15.56,88.74 13.65,88.74 IC4.22
GND  (via drill 0.61)
  Top 0.406: B16.P$4 B16ALT.P$4 B13ALT.P$4 | B15.P$4 B15ALT.P$4 | B9ALT.P$4 B8.P$4 | SSW1.1 13.34,72.86 20.32,65.88 B13.P$4 B14.P$4 40.8,65.88 41.27,66.36 44.61,66.36 45.09,65.88 B14ALT.P$4 | B8ALT.P$4 B7.P$4 43.66,73.66 43.66,76.67 42.39,77.94 42.39,78.58 SW1.D 42.23,78.74 41.27,79.69 39.05,79.69 37.62,81.12 B6.P$4 | v11.75,76.52 3.65,84.61 U$25.P$1 | B24.P$4 37.62,44.29 40.32,41.59 42.07,41.59 POT1.3 42.55,41.27 45.09,43.81 45.09,44.29 B24ALT.P$4 45.24,44.13 49.21,44.13 49.53,43.81 52.23,43.81 52.7,44.29 B25.P$4 | v66.99,55.24 66.99,52.23 v69.37,49.85 | B12ALT.P$4 94.77,81.12 95.25,81.6 97.95,81.6 98.42,81.12 B12.P$4 B5ALT.P$4 112.24,81.12 | B5ALT1.P$4 112.24,81.12 | B6ALT1.P$4 B6ALT.P$4 | B32ALT.P$4 B9ALT2.P$4 | U$27.P$1 109.7,63.18 112.39,65.88 112.24,65.88 112.24,81.12 | B31.P$4 140.65,44.29 139.86,45.08 137.48,45.08 136.68,44.29 B30ALT.P$4 | B28.P$4 B27ALT.P$4 | B21.P$4 B20ALT.P$4 B20.P$4 B19ALT.P$4 B19.P$4 | B18ALT.P$4 B18.P$4 | 3.81,12.54 3.65,12.38 U$28.P$1 3.88,12.68 3.88,20.05 7.25,23.43 12.62,23.43 v12.7,23.34 | B1.P$4 B1ALT.P$4 B2.P$4 B2ALT.P$4 | B17.P$4 B17ALT.P$4 121.44,22.54 122.56,21.43 122.56,14.76 115.09,7.3 105.89,7.3 U$26.P$1 | B11.P$4 B10ALT.P$4 | POT1ALT.3 144.75,59.92 159.38,45.3 159.38,44.3 B32.P$4
  Bottom 0.254: U$94.P$1 154.43,70.99 154.43,74.52 154.05,74.9 153.67,74.9
  Bottom 0.406: IC1.10 12.84,60.45 C1.1 13.02,60.01 13.02,52.54 8.26,47.78 C2.2 8.26,47.62 9.05,46.83 9.05,44.45 | C9.1 22.24,86.86 IC4.10 20.8,86.83 20,86.83 14.92,91.91 14.92,93.03 14.61,93.34 12.7,93.34 11.59,92.23 11.59,85.41 | 105.7,58.29 106.34,58.93 C13.1 106.52,59.37 106.52,60.01 109.54,63.02 U$27.P$1 | 105.7,58.29 105.54,58.13 105.54,57.78 | 105.54,57.78 IC7.17 105.57,56.35 105.57,51.59 106.84,50.32 106.84,49.37 IC7.10 106.84,49.21 106.84,44.92 106.2,44.29 B28ALT.P$4 | B13ALT.P$4 B13ALT1.P$4 B15.P$4 68.1,65.88 68.1,73.5 | B9ALT.P$4 68.1,73.5 | 68.1,73.5 B9.P$4 | 13.65,84.61 13.65,84.77 IC4.16 13.65,85.09 13.65,85.41 IC4.17 13.49,85.41 11.59,85.41 | 13.65,84.61 13.65,84.3 IC4.15 | 11.59,85.41 4.29,85.41 3.65,84.77 U$25.P$1 | B5.P$4 21.27,81.12 20.48,81.91 16.51,81.91 13.81,84.61 13.65,84.61 | C10.2 45.72,89.53 43.34,89.53 C12.2 43.18,89.53 40.64,89.53 C11.2 40.64,89.69 38.66,91.68 | 38.66,91.68 37.31,93.03 36.67,93.03 IC5.1 | SW1.C 37.31,78.58 37.31,81.12 B6.P$4 37.47,81.12 36.67,81.91 36.67,85.41 IC5.7 36.51,85.56 35.72,85.56 33.34,87.95 33.34,88.11 | SSW1.3 27.62,80.17 26.99,80.8 26.99,81.91 C22.2 27.15,81.91 28.89,83.66 28.89,87.31 28.97,87.39 | C3.1 27.94,90.64 28.97,89.61 | 28.97,89.61 29.21,89.38 30.32,89.38 IC5.11 30.64,89.22 31.27,89.22 32.38,88.11 33.34,88.11 | 28.97,87.39 28.89,87.47 28.89,89.53 28.97,89.61 | 28.97,87.39 29.53,86.83 30.32,86.83 IC5.9 | 33.34,88.11 33.66,88.11 | 33.66,88.11 36.51,88.11 IC5.5 | 33.66,88.11 33.66,88.26 35.88,90.49 36.51,90.49 IC5.3 36.67,90.64 37.62,90.64 38.66,91.68 | B14ALT.P$4 45.09,65.88 45.09,72.23 43.81,73.5 B7.P$4
  Bottom 0.406: v11.75,76.52 11.75,76.2 13.34,74.61 13.34,72.86 SSW1.1 | B8ALT.P$4 B8.P$4 | 8.49,43.58 8.26,43.81 IC2.2 | 8.49,43.58 8.97,43.1 | 8.97,43.1 10,42.07 10,36.67 9.53,36.19 8.26,36.19 IC2.14 | 8.49,43.58 8.26,43.34 IC2.3 | 9.05,44.45 9.05,43.18 8.97,43.1 | 9.05,44.45 22.23,44.45 B23.P$4 B23ALT.P$4 30,44.45 30,46.67 31.27,47.94 42.39,47.94 | 42.39,47.94 42.39,50.64 C6.2 | 42.39,47.94 45.09,45.24 45.09,44.29 B24ALT.P$4 | C16.2 93.03,50.64 93.03,48.73 90.96,46.67 90.96,44.29 B27ALT.P$4 B27.P$4 B26ALT.P$4 75.56,44.29 75.56,45.4 C8.2 72.23,48.89 71.28,49.85 v69.37,49.85 67.94,48.42 IC3.3 | 60.8,45.72 60.8,44.61 60.48,44.29 B25ALT.P$4 B25.P$4 | 60.8,45.72 60.8,48.1 IC3.14 | 66.99,55.08 66.36,55.08 66.04,54.77 66.04,54.13 IC3.23 | 66.99,55.08 67.31,54.77 67.31,54.13 IC3.25 | IC3.5 66.67,48.26 67.15,48.26 IC3.4 67.47,48.26 67.63,48.26 | 67.63,48.26 67.94,48.26 | 67.94,48.26 IC3.3 | 67.94,48.26 68.58,48.26 IC3.2 | v66.99,55.24 66.99,55.08 | B26.P$4 68.1,44.29 68.1,48.1 IC3.3 | 60.8,45.72 65.25,45.72 67.63,48.1 67.63,48.26 | C17.2 123.51,87.47 123.51,85.56 121.44,83.5 121.44,81.12 B6ALT.P$4 B5ALT1.P$4 | B6ALT1.P$4 B7ALT.P$4 136.68,81.12 139.22,78.58 139.38,78.55 144.12,78.55 SERIAL.1 144.38,78.55 145.62,79.8 147.38,79.8 152.25,74.92 153.62,74.92 153.67,74.9 | 147.32,44.29 B31ALT.P$4 B32.P$4 B32ALT.P$4 167,44.29 167,45.24 164.31,47.94 164.31,48.26 | 147.32,44.29 B31.P$4 | 164.31,48.26 164.31,49.37 C18.2 | B9ALT2.P$4 188.75,44.29 | 188.75,44.29 B7ALT1.P$4 | 164.15,48.26 164.31,48.26 | 105.54,57.78 104.46,57.78 104.14,57.47 104.14,56.67 IC7.15 | IC8.5 128.11,51.75 128.75,51.75 IC8.4 | IC8.3 129.38,51.75 128.91,51.75 IC8.4
  Bottom 0.406: 128.67,56.91 128.75,56.99 128.75,57.47 IC8.25 | 128.67,56.91 128.43,56.67 127.79,56.67 127.48,56.99 127.48,57.47 IC8.23 | 128.75,53.66 128.75,56.83 128.67,56.91 | 128.75,53.66 128.75,51.91 IC8.4 | IC8.4 128.91,51.59 129.7,50.8 130.33,50.8 130.81,51.27 130.81,51.59 IC8.1 130.81,51.75 133.67,51.75 133.99,51.43 C15.2 133.99,51.27 136.53,48.73 136.53,44.29 B30ALT.P$4 | B30.P$4 128.91,44.29 128.91,51.43 IC8.4 | B28ALT.P$4 B28.P$4 | B28ALT.P$4 B29.P$4 B29ALT.P$4 121.44,44.29 121.44,49.21 122.24,50 122.24,51.75 IC8.14 122.24,51.91 122.24,53.02 122.87,53.66 128.75,53.66 | 105.7,58.29 98.58,65.4 98.58,65.88 B16.P$4 | 188.44,24.13 188.44,27.78 C19.2 188.44,27.94 188.83,28.34 | 188.44,24.13 189.87,22.7 B22.P$4 | 188.83,28.34 190.82,30.32 U$51.P$1 | C7.2 142.72,27.78 142.72,24.13 144.15,22.7 B19.P$4 B18ALT.P$4 | 188.44,24.13 176.21,24.13 174.78,22.7 B21.P$4 | 1.75,41.27 2.22,41.27 IC2.23 | 1.75,41.27 1.27,41.75 1.27,42.23 1.59,42.54 | 1.59,42.54 2.22,42.54 IC2.25 | IC1.17 3.97,59.05 3.97,58.58 IC1.16 3.81,58.58 3.17,58.58 1.27,56.67 1.27,43.02 1.59,42.7 1.59,42.54 | 0.79,24.05 0.79,15.08 U$28.P$1 | 0.79,24.05 0.79,40.48 1.59,41.27 1.75,41.27 | C4.2 40.32,27.78 37.62,25.08 37.62,22.7 B2.P$4 | B2ALT.P$4 B3.P$4 B3ALT.P$4 B4.P$4 68.1,22.86 75.56,22.86 B4ALT.P$4 B10.P$4 B10ALT.P$4 90.96,22.7 90.96,25.08 93.03,27.14 93.03,27.78 C5.2 | 85.88,6.67 84.77,6.67 IC6.23 | 87.07,7.86 90.33,11.11 C14.2 | 87.07,7.86 85.88,6.67 | IC6.25 84.77,7.94 87,7.94 87.07,7.86 | 85.88,6.67 85.88,5.4 89.85,1.43 90.49,1.43 IC6.14 | C14.2 90.33,10.95 90.96,10.32 90.65,10 IC6.1 | 103.98,9.05 105.73,7.3 U$26.P$1 103.82,9.05 92.08,9.05
  Bottom 0.406: B11.P$4 B11ALT.P$4 B17.P$4 | v12.7,23.34 19.84,23.34 20,23.49 21.43,23.49 22.23,22.7 B1.P$4 | 3.97,23.34 PC2.- 3.62,24.05 0.79,24.05 | B17ALT.P$4 B18.P$4 | 188.75,44.29 188.75,28.41 188.83,28.34 | 92.08,9.05 91.6,8.57 90.65,8.57 IC6.3 | 92.08,9.05 92.08,9.52 90.49,11.11 C14.2 | 147.32,44.29 147.32,51.91 PC1.-
  pour Top: 0,-0.16 199.39,-0.16 199.39,95.09 0,95.09
  pour Bottom: 0,-0.16 199.39,-0.16 199.39,95.09 0,95.09
GPA0  (via drill 0.41)
  Top 0.203: v35.88,78.42 37.15,77.15 39.21,77.15 v40.01,76.36 | v42.39,80.17 47.15,80.17 48.1,81.12 B8ALT.P$5 B8.P$5
  Bottom 0.203: v35.88,78.42 32.7,78.42 27.94,73.66 25.4,73.66 19.05,67.31 10.79,67.31 5.24,61.75 4.13,61.75 IC1.21 | v40.01,76.36 40.01,76.67 41.27,77.94 41.27,79.06 v42.39,80.17
GPA1  (via drill 0.41)
  Top 0.203: v2.7,62.55 2.7,63.02 3.97,64.29 v3.97,67.15 | v12.54,74.29 12.7,74.13 16.99,74.13 17.3,73.82 21.27,73.82 21.91,74.45 24.92,74.45 25.24,74.13 30.96,74.13 33.02,76.2 v35.88,76.2 | v38.73,81.12 B7.P$5 47.47,81.12 48.9,82.55 57.78,82.55 v59.53,84.3 | v176.5,45.42 v165.5,56.42 165.5,66.67 v142.88,89.3
  Bottom 0.203: v2.7,62.55 3.97,62.55 IC1.22 | v3.97,67.15 5.4,67.15 v12.54,74.29 | v35.88,76.2 37.15,77.47 37.62,77.47 38.73,78.58 v38.73,81.12 | B7ALT1.P$5 190.02,36.67 190.98,37.62 190.98,44.61 190.18,45.4 176.53,45.4 v176.5,45.42 | v59.53,84.3 64.45,89.22 64.5,89.3 v142.88,89.3 | v165.5,56.42 158.62,56.42 145.5,69.55 145.5,73.92 144.75,74.67 143.88,74.67 142.75,73.55 136.62,73.55 B7ALT.P$5
GPA2  (via drill 0.41)
  Top 0.203: B6ALT1.P$5 B6ALT.P$5 116.68,73.5 113.03,77.15 v113.03,78.1 | v9.84,67.31 12.22,67.31 13.49,68.58 v16.51,68.58 | B6.P$5 v24.29,73.5 | v46.35,78.58 v56.04,78.58
  Bottom 0.203: v9.84,67.31 9.84,66.99 6.03,63.18 4.13,63.18 IC1.23 | v16.51,68.58 19.37,68.58 v24.29,73.5 | v113.03,78.1 109.86,78.1 109.54,78.42 60.01,78.42 59.85,78.26 56.36,78.26 v56.04,78.58 | v46.35,78.58 44.93,77.15 41.59,77.15 40.64,76.2 40.64,76.04 38.1,73.5 B6.P$5
GPA3  (via drill 0.41)
  Top 0.203: v90.65,60.16 93.66,63.18 97.16,63.18 106.05,72.07 106.05,73.5 B5ALT.P$5 | v78.74,46.99 78.74,46.67 79.69,45.72 81.92,45.72 82.23,45.4 82.23,42.54 78.58,38.89 60.96,38.89 60.8,38.73 56.52,38.73 56.36,38.89 45.09,38.89 v44.93,38.73 | v31.11,43.5 31.11,44.45 26.67,48.89 25.56,48.89 10.95,63.5 9.53,63.5 7.62,65.4 v7.62,65.72
  Bottom 0.203: B5ALT1.P$5 B5ALT.P$5 | 7.78,65.56 9.21,66.99 9.21,70.17 11.11,72.07 12.22,72.07 13.02,71.28 20,71.28 22.23,73.5 B5.P$5 | 7.78,65.56 6.03,63.82 4.13,63.82 IC1.24 | v90.65,60.16 86.2,55.72 86.2,54.45 v78.74,46.99 | v44.93,38.73 43.81,38.73 42.86,39.69 42.55,39.69 41.75,40.48 41.75,40.8 40.96,41.59 38.42,41.59 38.26,41.43 33.5,41.43 32.86,42.07 32.54,42.07 v31.11,43.5 | 7.78,65.56 v7.62,65.72
GPA4  (via drill 0.41)
  Top 0.203: v2.38,64.29 2.38,63.97 0.64,62.23 0.64,33.65 v3.02,31.27 | B1.P$5 B1ALT.P$5
  Bottom 0.203: v2.38,64.29 3.97,64.29 IC1.25 | 17,17.3 20,17.3 22.23,15.08 B1.P$5 | 17,17.3 16.99,17.3 | 17,17.3 16.75,17.3 7,27.05 3,27.05 2.75,27.3 2.75,30.93 3,31.18 v3.02,31.27
GPA4S  (via drill 0.41)
  Top 0.203: v12.38,90.64 12.38,84.93 13.18,84.14 13.18,80.48 SSW1.2
  Bottom 0.203: v12.38,90.64 13.49,90.64 IC4.25
GPA5  (via drill 0.41)
  Top 0.203: v2.7,60.64 2.7,56.67 v4.76,54.61 | v8.1,52.86 8.1,52.54 14.45,46.2 v14.45,42.38 | v14.45,36.35 20.32,30.48 v20.32,22.7 | B2.P$5 B2ALT.P$5
  Bottom 0.203: v2.7,60.64 1.75,61.59 1.75,64.61 2.06,64.93 3.97,64.93 IC1.26 | v4.76,54.61 6.35,54.61 v8.1,52.86 | v14.45,36.35 v14.45,42.38 | v20.32,22.7 20.8,22.7 23.5,20 30.48,20 33.18,17.3 35.24,17.3 37.47,15.08 B2.P$5
GPA6  (via drill 0.41)
  Top 0.203: v5.71,65.72 6.67,65.72 25.56,46.83 25.56,46.51 30.48,41.59 33.97,41.59 40.8,34.77 40.8,32.86 48.42,25.24 48.42,22.7 52.7,18.41 52.7,15.08 B3.P$5 B3ALT.P$5
  Bottom 0.203: v5.71,65.72 4.13,65.72 IC1.27
GPA7  (via drill 0.41)
  Top 0.203: v6.35,65.09 6.67,65.09 23.02,48.73 23.02,46.51 25.08,44.45 26.04,44.45 v29.21,41.27 | v43.18,33.02 44.13,33.02 54.77,22.38 56.36,22.38 62.55,16.19 62.55,15.87 63.34,15.08 B4.P$5 B4ALT.P$5
  Bottom 0.203: v6.35,65.09 6.35,66.04 6.03,66.36 4.13,66.36 IC1.28 | v29.21,41.27 29.21,40.32 34.29,35.24 36.83,35.24 39.05,33.02 v43.18,33.02
GPA8  (via drill 0.41)
  Top 0.203: v16.99,66.2 19.21,66.2 28.42,56.99 89.53,56.99 90.81,58.26 B16ALT.P$5 B16.P$5
  Bottom 0.203: v16.99,66.2 11.27,66.2 IC1.1
GPA9  (via drill 0.41)
  Top 0.203: v16.35,65.56 19.21,65.56 28.26,56.51 32.07,56.51 33.97,54.61 v44.45,54.61 | v47.47,57.62 47.94,57.62 48.1,57.47 59.53,57.47 60.33,58.26 B15ALT.P$5 B15.P$5
  Bottom 0.203: v16.35,65.56 11.27,65.56 IC1.2 | v47.47,57.62 v44.45,54.61
GPA10  (via drill 0.41)
  Top 0.203: v12.54,64.93 12.54,63.97 16.83,59.69 16.83,59.05 22.86,53.02 v32.23,53.02 | B14ALT.P$5 43.66,58.26 43.18,57.78 38.1,57.78 37.62,58.26 B14.P$5
  Bottom 0.203: v12.54,64.93 11.27,64.93 IC1.3 | v32.23,53.02 33.02,53.02 37.47,57.47 37.47,58.26 B14.P$5
GPA11  (via drill 0.41)
  Top 0.203: B13ALT.P$5 B13ALT1.P$5 69.37,58.26 v64.61,63.02 | v14.13,64.29 17.94,60.48 20,60.48 22.23,58.26 B13.P$5 | v41.91,64.29 41.27,63.66 v22.7,63.66
  Bottom 0.203: v14.13,64.29 11.27,64.29 IC1.4 | v64.61,63.02 63.98,63.02 63.34,63.66 58.26,63.66 56.36,65.56 50.64,65.56 49.37,64.29 v41.91,64.29 | v22.7,63.66 20.8,63.66 17.62,60.48 17.3,60.48 16.83,60.01 16.83,59.05 17.62,58.26 B13.P$5
GPA12  (via drill 0.41)
  Top 0.203: v23.02,70.33 23.02,71.28 24.45,72.71 36.99,72.71 37.62,72.07 56.2,72.07 63.02,78.9 64.29,78.9 66.52,81.12 B9ALT.P$5 B9.P$5 | B9ALT2.P$5 174.62,36.67 174.62,37.46 170.02,42.07 167.16,42.07 164.94,44.29 164.88,44.3 164.88,66.42 v143.88,87.42
  Bottom 0.203: v23.02,70.33 22.7,70.33 19.21,66.83 18.57,66.83 15.4,63.66 11.27,63.66 IC1.5 | B9.P$5 78.9,81.12 86.52,88.74 86.5,88.8 131.25,88.8 132.62,87.42 v143.88,87.42
GPA13  (via drill 0.41)
  Top 0.203: v8.73,62.07 9.05,62.07 22.38,48.73 v22.38,48.42 | v28.1,48.42 28.1,48.1 31.91,44.29 31.91,42.7 32.54,42.07 35.08,42.07 41.91,35.24 42.55,35.24 50.96,26.83 52.23,26.83 52.7,26.35 67.31,26.35 71.28,22.38 72.55,22.38 77.63,17.3 80.96,17.3 83.19,15.08 B10.P$5 83.98,15.08 86.2,12.86 86.2,12.54 88.42,10.32 89.06,10.32 90.81,12.06 90.81,15.08 B10ALT.P$5
  Bottom 0.203: v8.73,62.07 9.68,63.02 11.11,63.02 IC1.6 | v28.1,48.42 v22.38,48.42
GPA14  (via drill 0.41)
  Top 0.203: v12.54,63.02 12.54,62.7 25.88,49.37 30.64,49.37 33.18,46.83 33.18,46.51 40.8,38.89 41.12,38.89 41.91,38.1 41.91,37.78 52.86,26.83 97.31,26.83 101.76,22.38 102.08,22.38 106.05,18.41 106.05,15.08 | 106.05,15.08 B11.P$5 | 106.05,15.08 B11ALT.P$5
  Bottom 0.203: v12.54,63.02 12.06,62.55 11.27,62.55 IC1.7
GPA15  (via drill 0.41)
  Top 0.203: v8.41,61.12 9.05,61.12 v13.81,56.35 | v26.04,56.83 27.3,56.83 28.1,56.04 31.91,56.04 33.81,54.13 43.97,54.13 44.13,53.97 v46.67,53.97 | v48.42,58.1 58.1,58.1 63.66,63.66 68.74,63.66 72.39,67.31 74.93,67.31 77.47,69.85 82.55,69.85 86.2,73.5 B12ALT.P$5 B12.P$5
  Bottom 0.203: v8.41,61.12 8.73,61.12 9.37,61.75 11.11,61.75 IC1.8 | v13.81,56.35 23.34,56.35 23.81,56.83 v26.04,56.83 | v46.67,53.97 48.42,55.72 v48.42,58.1
GPA16  (via drill 0.41)
  Top 0.203: v104.46,47.94 v108.27,51.75 | v104.46,45.08 104.46,42.86 102.87,41.27 102.23,41.27 101.92,41.59 101.28,41.59 93.82,34.13 93.82,33.81 90.49,30.48 49.85,30.48 48.1,32.22 48.1,34.45 45.88,36.67 B24ALT.P$5 | v45.24,27.46 44.61,27.46 37.62,34.45 37.62,36.67 B24.P$5
  Bottom 0.203: v108.27,51.75 108.11,51.91 108.11,56.51 IC7.21 | v104.46,45.08 v104.46,47.94 | v45.24,27.46 45.24,36.67 B24ALT.P$5
GPA17  (via drill 0.41)
  Top 0.203: v108.74,54.45 101.44,47.15 101.44,45.88 99.38,43.81 99.38,40.64 93.98,35.24 83.19,35.24 79.06,31.11 v50.16,31.11 | v45.88,26.83 43.02,26.83 33.18,36.67 B23ALT.P$5 B23.P$5
  Bottom 0.203: v108.74,54.45 108.74,56.51 IC7.22 | v45.88,26.83 v50.16,31.11
GPA18  (via drill 0.41)
  Top 0.203: v120.81,59.53 124.94,59.53 136.05,48.42 149.07,48.42 153.83,43.65 153.83,40.16 155.1,38.89 155.89,38.89 159.54,35.24 165.1,35.24 185.26,15.08 B22.P$5
  Bottom 0.203: v120.81,59.53 111.6,59.53 109.54,57.47 109.54,56.67 IC7.23
GPA19  (via drill 0.41)
  Top 0.203: v118.59,58.26 122.4,58.26 132.24,48.42 132.24,45.56 v134.62,43.18 | v151.61,41.27 151.61,39.84 156.21,35.24 157.48,35.24 168.91,23.81 174.94,23.81 176.05,22.7 176.05,16.35 174.78,15.08 B21.P$5
  Bottom 0.203: v118.59,58.26 111.12,58.26 110.17,57.31 110.17,56.67 IC7.24 | v134.62,43.18 136.21,41.59 151.29,41.59 v151.61,41.27
GPA20  (via drill 0.41)
  Top 0.203: v110.81,54.93 110.81,47.94 112.71,46.04 112.71,16.03 113.67,15.08 B17.P$5 B17ALT.P$5
  Bottom 0.203: v110.81,54.93 110.81,56.51 IC7.25
GPA21  (via drill 0.41)
  Top 0.203: v112.08,53.97 112.71,53.97 117.63,49.05 v122.4,49.05 | v124.62,44.29 127.16,41.75 127.16,37.3 127.95,36.51 127.95,35.88 v128.11,35.72 | v128.11,29.84 128.11,23.34 127.95,23.18 127.95,21.43 128.91,20.48 128.91,15.08 B18.P$5 B18ALT.P$5
  Bottom 0.203: v112.08,53.97 111.44,54.61 111.44,56.51 IC7.26 | v122.4,49.05 124.62,46.83 v124.62,44.29 | v128.11,29.84 v128.11,35.72
GPA22  (via drill 0.41)
  Top 0.203: v112.08,54.93 111.44,54.29 111.44,49.53 117,43.97 118.27,43.97 123.51,38.73 123.51,37.46 125.73,35.24 127,35.24 139.86,22.38 140.18,22.38 144.15,18.41 144.15,15.08 B19.P$5 B19ALT.P$5
  Bottom 0.203: v112.08,54.93 112.08,56.51 IC7.27
GPA23  (via drill 0.41)
  Top 0.203: v113.82,50.96 113.82,50 117,46.83 117,45.88 123.98,38.89 124.94,38.89 127.48,36.35 127.48,35.4 136.53,26.35 141.29,26.35 143.19,24.45 143.19,22.22 144.94,20.48 150.81,20.48 153.99,17.3 153.99,15.87 154.78,15.08 B20.P$5 B20ALT.P$5
  Bottom 0.203: v113.82,50.96 113.98,51.12 113.98,54.61 112.71,55.88 112.71,56.51 IC7.28
GPA24  (via drill 0.41)
  Top 0.203: v119.22,58.89 121.13,60.8 124.3,60.8 136.21,48.89 150.18,48.89 155.1,43.97 155.42,43.97 159.38,40 159.38,36.67 B32.P$5 B32ALT.P$5
  Bottom 0.203: v119.22,58.89 119.22,55.4 113.19,49.37 112.71,49.37 IC7.1
GPA25  (via drill 0.41)
  Top 0.203: v116.84,47.94 126.36,47.94 127.32,48.89 127.95,48.89 129.7,47.15 129.7,46.51 132.24,43.97 132.56,43.97 134.62,41.91 134.62,38.42 135.41,37.62 138.59,37.62 139.54,36.67 B31.P$5 B31ALT.P$5
  Bottom 0.203: v116.84,47.94 112.71,47.94 112.08,48.58 112.08,49.21 IC7.2
GPA26  (via drill 0.41)
  Top 0.203: v112.87,51.59 114.14,51.59 117.32,48.42 125.25,48.42 v125.41,48.58 | v127.64,46.35 127.64,37.94 128.91,36.67 B30.P$5 B30ALT.P$5
  Bottom 0.203: v112.87,51.59 111.44,50.16 111.44,49.37 IC7.3 | v127.64,46.35 v125.41,48.58
GPA27  (via drill 0.41)
  Top 0.203: v113.67,45.56 113.82,45.56 114.78,44.61 114.78,37.62 113.82,36.67 | 113.82,36.67 B29ALT.P$5 | 113.82,36.67 B29.P$5
  Bottom 0.203: v113.67,45.56 110.81,48.42 110.81,49.21 IC7.4
GPA28  (via drill 0.41)
  Top 0.203: v110.01,50.64 109.7,50.64 106.68,47.62 105.73,47.62 102.55,44.45 v102.55,41.91 | v98.74,41.91 98.74,40.64 93.82,35.72 83.03,35.72 80.33,33.02 61.91,33.02 60.48,34.45 60.48,36.67 B25ALT.P$5 B25.P$5
  Bottom 0.203: v110.01,50.64 110.01,49.37 IC7.5 | v98.74,41.91 v102.55,41.91
GPA29  (via drill 0.41)
  Top 0.203: v109.38,53.81 109.38,54.77 109.06,55.08 104.93,55.08 95.57,45.72 87,45.72 79.69,38.42 79.69,37.46 78.9,36.67 B26ALT.P$5 B26.P$5
  Bottom 0.203: v109.38,53.81 109.38,49.37 IC7.6
GPA30  (via drill 0.41)
  Top 0.203: v108.74,50.64 108.11,50.64 101.44,43.97 100.49,43.97 v100.01,43.5 | v98.74,42.86 96.84,40.96 96.84,39.37 94.14,36.67 B27ALT.P$5 B27.P$5
  Bottom 0.203: v108.74,50.64 108.74,49.37 IC7.7 | v100.01,43.5 99.38,43.5 v98.74,42.86
GPA31  (via drill 0.41)
  Top 0.203: v109.06,45.08 109.06,44.29 107.47,42.7 107.47,37.94 106.2,36.67 B28ALT.P$5 B28.P$5
  Bottom 0.203: v109.06,45.08 109.06,47.15 108.27,47.94 108.27,49.21 IC7.8
GPB4  (via drill 0.41)
  Top 0.203: v19.53,90.17 19.53,80.8 25.08,75.25 25.56,75.25 SSW1.8
  Bottom 0.203: v19.53,90.17 20.8,90.17 IC4.5
I2C_SCL  (via drill 0.41)
  Top 0.203: 134.3,56.51 134.25,56.51 | 134.25,56.51 v129.54,56.51 129.22,56.51 124.14,61.59 v121.6,61.59 | v68.42,52.07 86.36,52.07 87.47,50.96 98.27,50.96 v99.22,51.91 | v103.5,58.89 v103.5,61.75 | v7.46,22.54 21.43,8.57 v83.66,8.57 v86.2,11.11 | 2.38,39.37 v2.38,33.97 | 3.49,42.86 v3.49,43.18 v3.49,54.29 1.91,55.88 v1.91,58.42 | v14.13,81.75 v18.89,86.52 | v106.05,46.99 106.36,46.99 107.63,45.72 109.38,45.72 112.08,43.02 112.08,34.29 105.89,28.1 v90.33,28.1 | v88.74,26.19 88.74,22.07 87.47,20.8 v87.47,13.81 | v12.54,49.37 v8.1,53.81 | v12.54,45.24 12.54,44.92 11.27,43.65 v11.27,42.38 | v8.57,35.4 8.57,34.29 8.26,33.97 v8.26,27.78 | v9.21,26.83 8.89,26.83 v6.19,24.13 | v155.88,72.05 150.62,72.05 150.19,72.49 | 150.19,72.49 146.88,75.8 SERIAL.4 | 150.19,72.49 134.25,56.55 134.25,56.51
  Bottom 0.203: v129.54,56.51 129.54,57.47 IC8.26 | v68.42,52.07 67.79,52.7 67.79,53.34 67.94,53.5 67.94,53.97 IC3.26 | 103.5,51.91 103.66,51.91 105.41,50.16 105.41,49.37 IC7.12 105.57,49.21 105.57,47.46 v106.05,46.99 | 103.5,51.91 v99.22,51.91 | v121.6,61.59 121.6,63.34 118.43,66.52 108.27,66.52 v103.5,61.75 | 103.5,51.91 v103.5,58.89 | v83.66,8.57 84.61,8.57 IC6.26 | v7.46,22.54 7.46,22.86 v6.19,24.13 6.12,24.18 6.12,24.55 4.75,25.93 3.5,25.93 2.38,27.05 2.38,33.92 v2.38,33.97 | IC2.26 2.38,43.18 v3.49,43.18 | v3.49,54.29 5.56,56.35 | 5.56,56.35 8.26,59.05 11.11,59.05 IC1.12 | v18.89,86.52 19.84,85.56 20.8,85.56 IC4.12 | v14.13,81.75 12.7,81.75 3.97,73.02 3.97,71.75 0.64,68.42 0.64,59.69 v1.91,58.42 | v90.33,28.1 90.33,27.78 v88.74,26.19 | v87.47,13.81 86.2,12.54 v86.2,11.11 | v8.1,53.81 5.56,56.35 | v12.54,45.24 v12.54,49.37 | v11.27,42.38 11.27,37.46 11.43,37.3 11.43,36.67 10.16,35.4 v8.57,35.4 | v9.21,26.83 v8.26,27.78 | v155.88,72.05 155.88,71.05 U$94.P$4
I2C_SDA  (via drill 0.41)
  Top 0.203: v4.13,47.94 v4.13,43.81 4.76,43.18 5.71,43.18 6.03,43.5 6.03,58.89 5.08,59.85 5.08,62.07 | v18.89,85.56 18.89,82.55 5.08,68.74 5.08,62.07 | 135.57,58.74 v130.02,58.74 130,58.8 v130,69.05 | v89.22,11.43 89.22,25.4 v89.53,25.72 | v106.84,39.69 106.84,42.07 105.09,43.81 v105.09,46.04 | 70.96,53.02 87.95,53.02 89.06,51.91 v98.27,51.91 | 70.96,53.02 v68.42,53.02 | v108.27,69.05 108.27,67.47 v101.44,60.64 | 5.08,62.07 6.51,62.07 19.37,49.21 v20.95,49.21 | v31.27,49.69 35.88,49.69 36.67,48.89 v53.66,48.89 | v59.05,50.8 63.82,50.8 64.29,51.27 v66.83,51.27 | 70.96,53.02 v70.96,52.7
  Bottom 0.203: v4.13,43.81 2.38,43.81 IC2.27 | v4.13,47.94 10.16,53.97 10.16,58.1 10.48,58.42 11.11,58.42 IC1.13 | v18.89,85.56 19.53,84.93 20.8,84.93 IC4.13 | v130.02,58.74 130.02,57.62 IC8.27 | v89.22,11.43 87,9.21 84.77,9.21 IC6.27 | v89.53,25.72 89.53,26.35 98.58,35.4 106.2,35.4 107.16,36.35 107.16,39.37 v106.84,39.69 | v105.09,46.04 105.09,48.42 104.93,48.58 104.93,49.21 IC7.13 104.78,49.37 104.78,50.16 104.62,50.32 99.85,50.32 v98.27,51.91 101.44,55.08 v101.44,60.64 | v68.42,53.02 68.58,53.18 68.58,53.97 IC3.27 | v108.27,69.05 v130,69.05 | v130,69.05 130.33,69.05 137.16,75.88 137.25,75.92 144.25,75.92 SERIAL.3 144.38,75.8 145.5,74.67 147.25,74.67 151.75,70.17 155.25,70.17 155.5,70.42 155.5,70.92 U$94.P$3 | v20.95,49.21 30.8,49.21 v31.27,49.69 | v53.66,48.89 57.15,48.89 v59.05,50.8 | v66.83,51.27 67.31,51.27 67.94,50.64 68.9,50.64 v70.96,52.7 | v130,69.05
L0
  Top 0.203: B1.P$2 B1ALT.P$2
  Bottom 0.203: B1.P$2 R20.1
L1
  Top 0.203: B1.P$3 B1ALT.P$3
  Bottom 0.203: B1.P$3 R19.1
L2
  Top 0.203: B2.P$2 B2ALT.P$2
  Bottom 0.203: B2.P$2 32.86,21.27 31.59,21.27 R18.1
L3
  Top 0.203: B2.P$3 B2ALT.P$3
  Bottom 0.203: B2.P$3 32.86,16.51 31.59,16.51 R17.1
L4
  Bottom 0.203: R16.1 46.83,21.27 48.1,21.27 B3.P$2 B3ALT.P$2
L5
  Bottom 0.203: R15.1 46.83,16.51 48.1,16.51 B3.P$3 B3ALT.P$3
L6
  Bottom 0.203: B4ALT.P$2 70.96,21.27 69.69,21.27 R14.1 69.53,21.11 68.74,20.32 67.31,20.32 66.2,21.43 B4.P$2
L7
  Top 0.203: B4ALT.P$3 B4.P$3
  Bottom 0.203: B4ALT.P$3 70.96,16.51 69.69,16.51 R13.1
L8  (via drill 0.41)
  Top 0.203: B5ALT1.P$2 B5ALT.P$2 | v23.02,79.85 23.34,79.85 26.04,82.55 26.99,82.55 27.46,83.02 v33.02,83.02 | v33.97,83.98 34.45,83.5 37.15,83.5 38.89,85.25 55.24,85.25 55.4,85.41 v96.04,85.41
  Bottom 0.203: B5.P$2 R12.1 19.37,79.85 20.16,79.06 22.23,79.06 v23.02,79.85 | v33.97,83.98 v33.02,83.02 | B5ALT.P$2 v96.04,85.41
L9  (via drill 0.41)
  Top 0.203: B5.P$3 17.78,75.88 18.89,76.99 v18.89,80.96 | v20.32,80.96 20.32,82.87 25.4,87.95 41.59,87.95 41.91,87.63 86.36,87.63 86.52,87.47 v87.47,87.47 | B5ALT.P$3 v95.57,80.8
  Bottom 0.203: B5.P$3 R11.1 | B5ALT1.P$3 B5ALT.P$3 | v20.32,80.96 v18.89,80.96 | v87.47,87.47 94.14,80.8 v95.57,80.8
L10
  Top 0.203: B6ALT1.P$2 117,79.85 | B6.P$2 35.24,79.85 36.51,81.12 36.51,82.23 39.05,84.77 59.05,84.77 59.21,84.93 95.57,84.93 95.73,84.77 112.08,84.77 117,79.85 | 117,79.85 B6ALT.P$2
  Bottom 0.203: B6.P$2 33.18,80.01 34.45,80.01 R10.1
L11  (via drill 0.41)
  Top 0.203: B6ALT1.P$3 B6ALT.P$3 115.73,75.88 115.73,80.48 113.98,82.23 64.45,82.23 58.42,76.2 v57.78,76.2 | v42.86,74.77 B6.P$3
  Bottom 0.203: B6.P$3 33.18,74.61 34.45,74.61 R9.1 | v42.86,74.77 46.83,74.77 48.26,76.2 v57.78,76.2
L12  (via drill 0.41)
  Top 0.203: B7.P$2 54.45,74.77 55.88,76.2 56.2,76.2 v63.5,83.5 | v66.2,86.52 86.2,86.52 86.36,86.36 95.41,86.36 95.57,86.52 125.57,86.52 132.08,80.01 B7ALT.P$2
  Bottom 0.203: B7.P$2 48.42,74.93 49.69,74.93 R8.1 | 137.16,79.85 B7ALT.P$2 132,79.92 128.75,79.92 128,80.67 128,81.55 128.62,82.17 153.75,82.17 166.12,69.8 166.12,51.42 174.5,43.05 185.38,43.05 B7ALT1.P$2 | v63.5,83.5 63.5,83.82 v66.2,86.52
L13  (via drill 0.41)
  Top 0.203: B7ALT1.P$3 184.31,39.05 184.31,43.02 184.25,43.05 177.38,43.05 v165.5,54.92 | v54.45,79.85 B7.P$3 | v63.18,86.04 65.72,86.04 65.88,85.88 95.57,85.88 95.73,86.04 125.41,86.04 130.97,80.48 130.97,75.88 B7ALT.P$3 133.19,74.77 138.43,69.53 138.5,69.55 138.62,69.42 v143.38,69.42
  Bottom 0.203: B7.P$3 48.42,79.69 49.69,79.69 R7.1 | v54.45,79.85 57.15,82.55 59.69,82.55 v63.18,86.04 | v165.5,54.92 157.88,54.92 v143.38,69.42
L14
  Bottom 0.203: B8ALT.P$2 56.04,74.93 57.31,74.93 R6.1 57.47,74.93 58.42,75.88 59.69,75.88 60.8,74.77 B8.P$2
L15